# Altium PCB Hydro_Node_PCB.PcbDoc
Units mm, origin at the board's own origin, x right, y up, seen from the top; angles counter-clockwise.
Board outline 90 x 70 mm, 2 copper layers (Top Layer, Bottom Layer); 38 components, 30 nets, 139 pads, 1 vias.
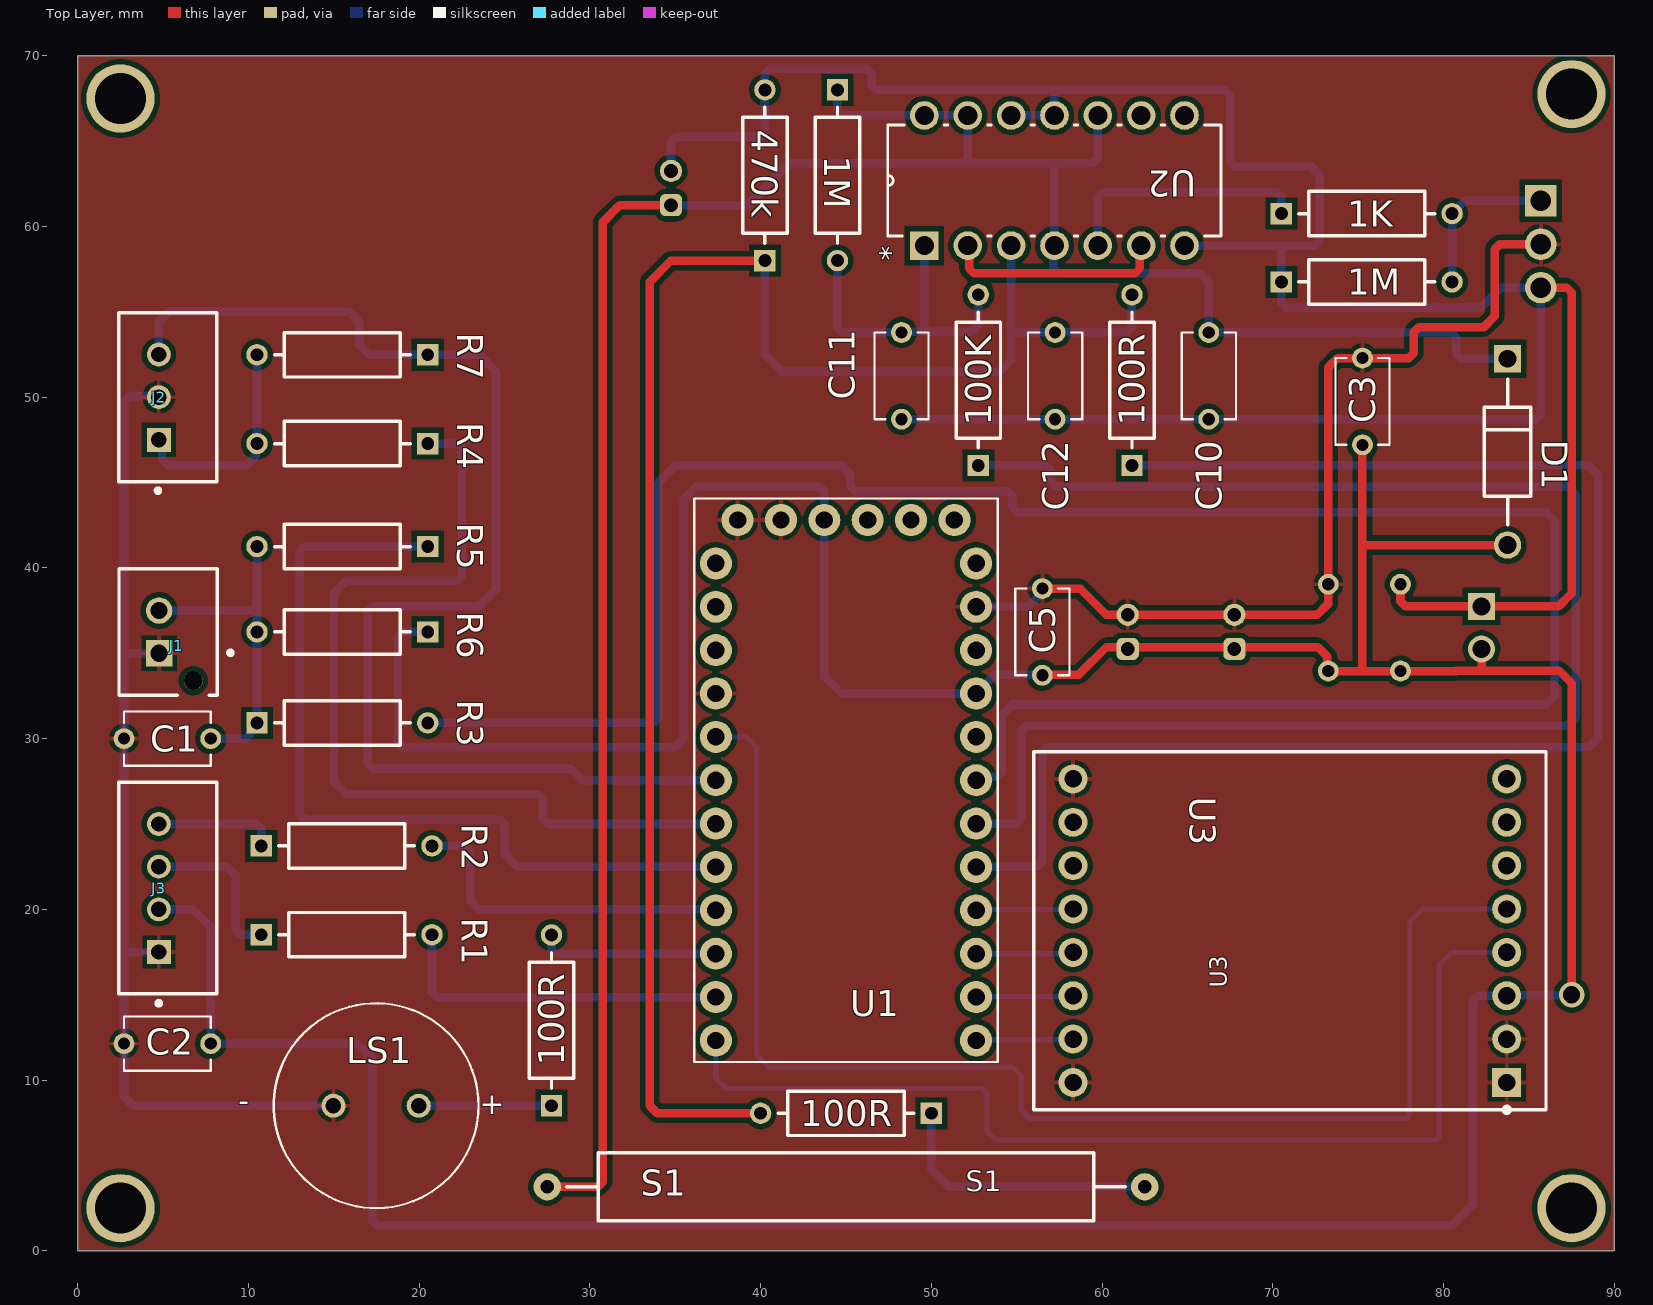
[diagram p0: Top Layer view]
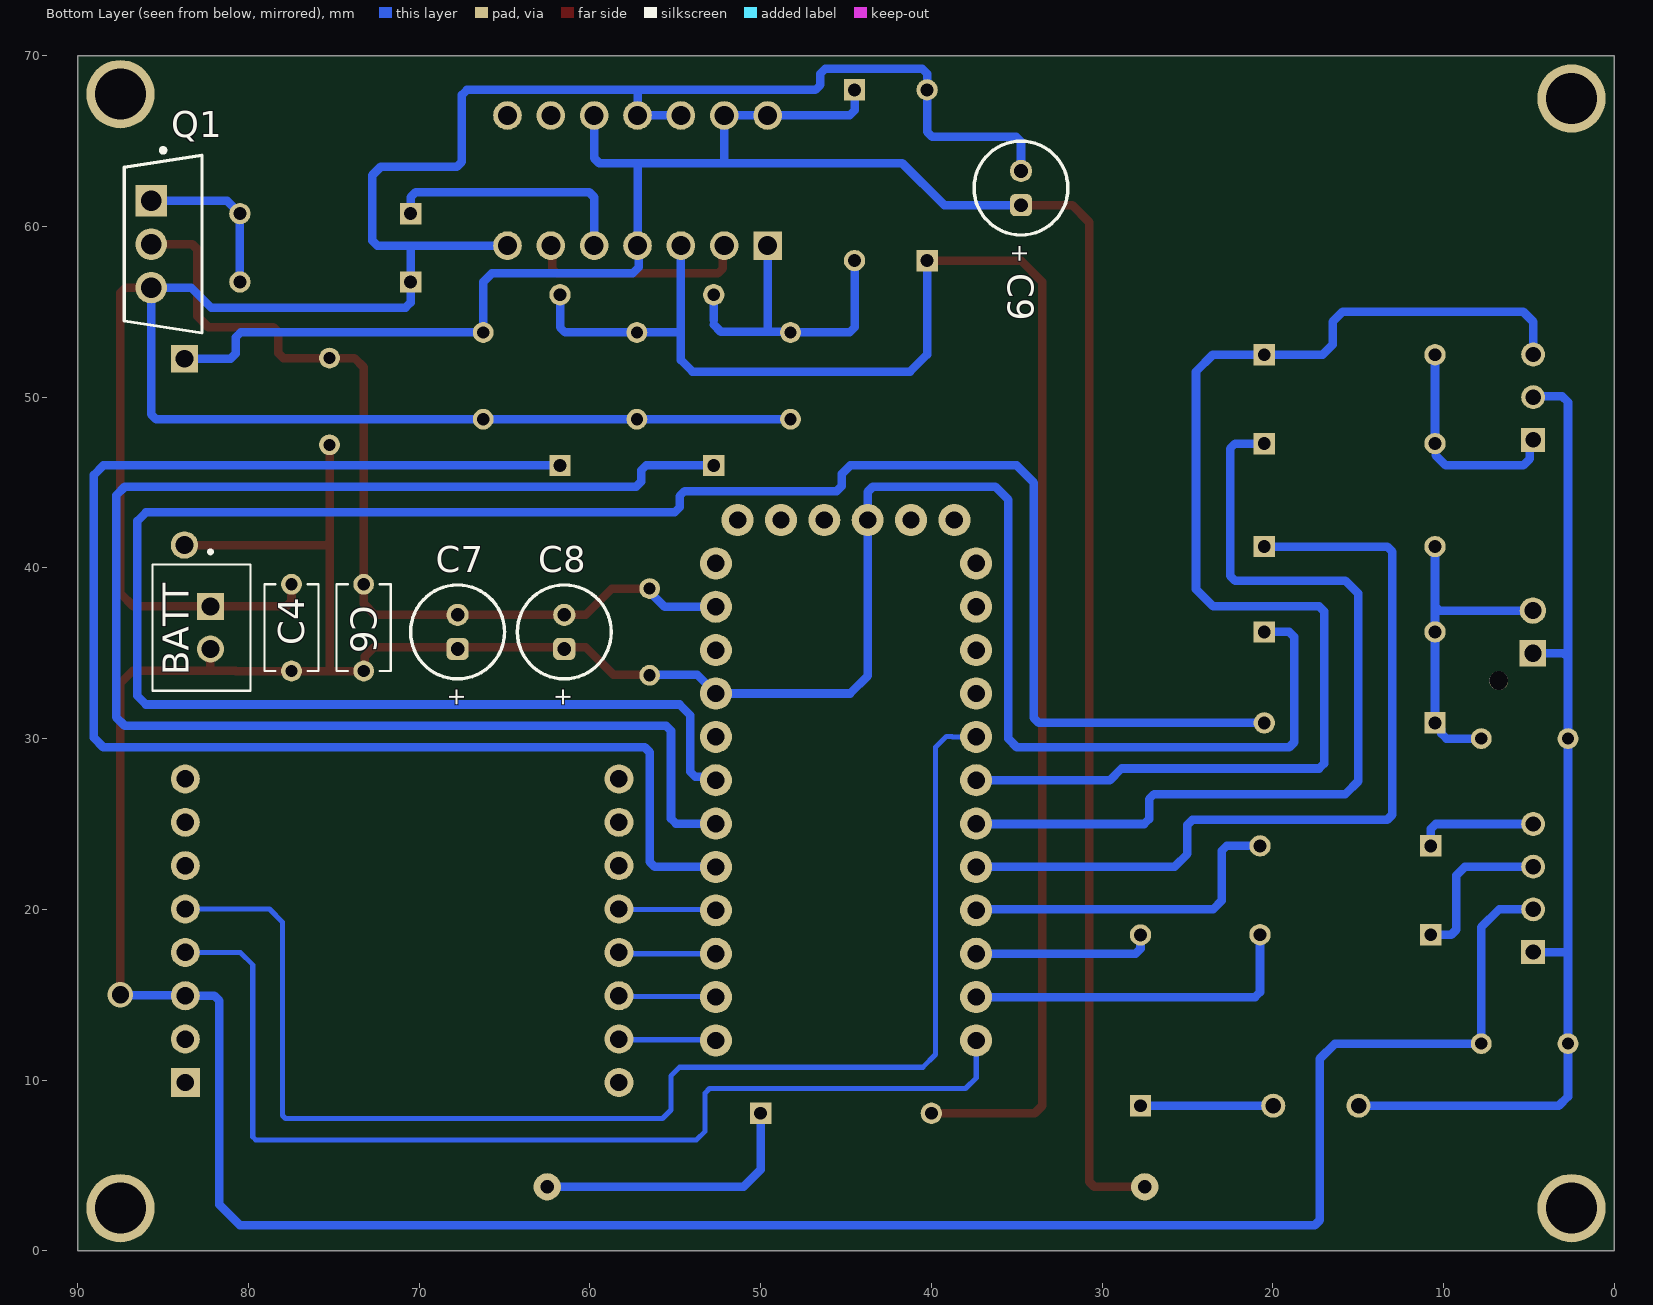
[diagram p1: Bottom Layer view, seen from below]
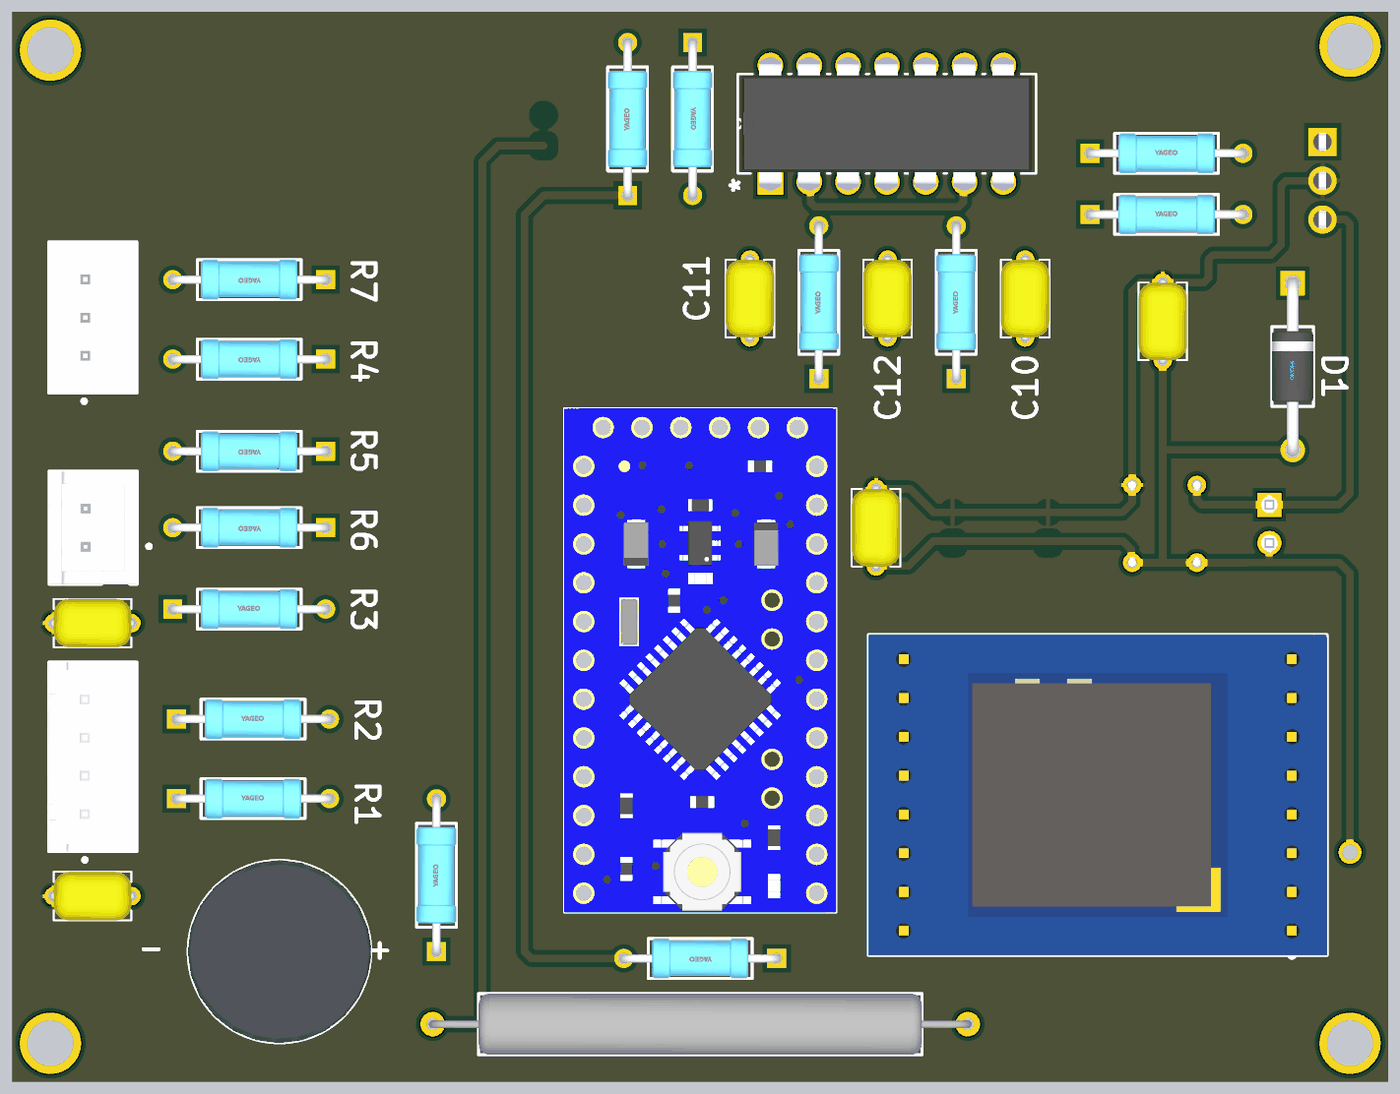
[diagram p2: 3D render of the assembled board from above, using the file's embedded part models]
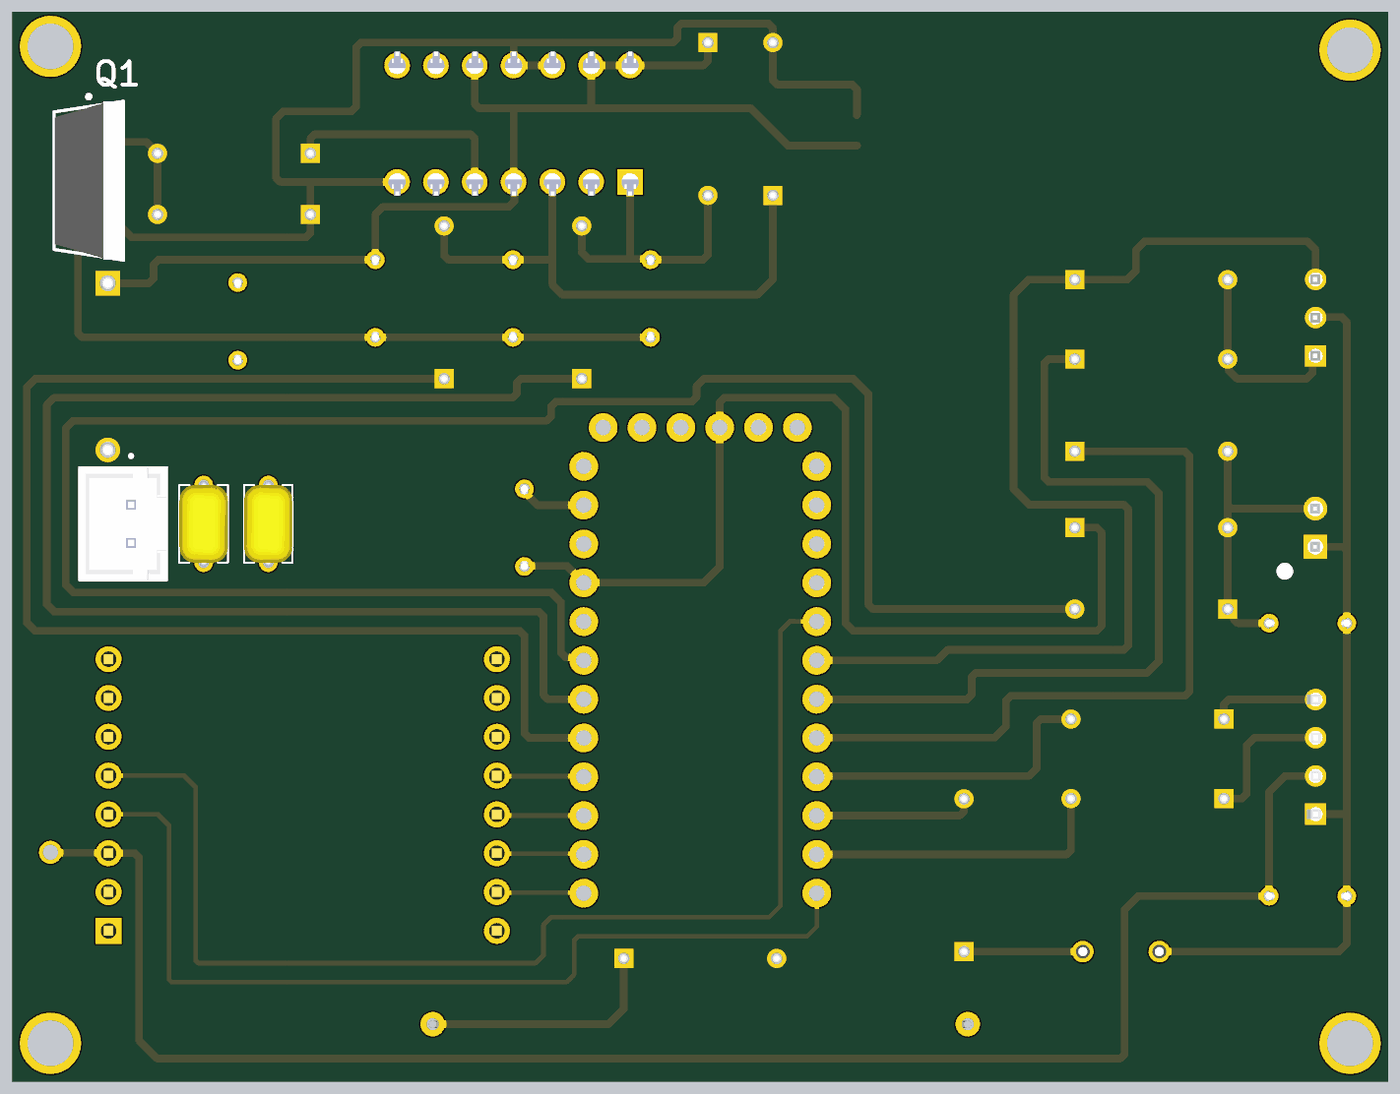
[diagram p3: 3D render of the assembled board from below, using the file's embedded part models]

## Layer stack, top to bottom
Top Solder: solder mask 0.0102, Solder Resist, Dk 3.5
Top Layer: signal copper 0.0356
Dielectric 1: dielectric 0.32, FR-4, Dk 4.8
Bottom Layer: signal copper 0.0356
Bottom Solder: solder mask 0.0102, Solder Resist, Dk 3.5

## Board outline
0,0 0,70 90,70 90,0

## Design rules (kind name [scope] priority, off if disabled: settings)
Clearance [All] p1: gap=0.3 ignorepadtopadclearanceinfootprint=FALSE
HoleSize [All] p1: absolutevalues=TRUE maxlimit=3 minlimit=0.025 maxpercent=80.000 minpercent=20.000
PolygonConnect [All] p1: connectstyle=Relief reliefconductorwidth=0.254 reliefentries=4 polygonreliefangle="90 Angle" airgapwidth=0.254
RoutingVias [All] p1: holewidth=0.711 width=1.27 viastyle="Through Hole" minholewidth=0.711 minwidth=1.27 maxholewidth=0.711 maxwidth=1.5
SolderMaskExpansion [All] p1: expansion=0.102 istentingtop=FALSE
Width [All] p1: maxlimit=1 minlimit=0.3 preferedwidth=0.5
29 further rules are at their usual default settings.

## Classes and differential pairs
component class Hydro_Node_Schematic: 1K 1M 100K 100R 100r 470k BATT C1 C2 C3 C4 C5 C6 C7 C8 C9 C11 C12 D1 J1 J2 J3 LS1 Q1 R1 R2 R3 R4 R5 R6 R7 S1 U1 U3

## Components (designator, comment, footprint, x,y, rotation, side; value= is the part's Value field where it differs from the comment)
1K "1 KΩ" FP-MFR-25-MFG 75.5,60.75 r0 top value=1kΩ (schematic designator R10)
1M "1 MΩ" FP-MFR-25-MFG 44.5,63 r270 top (schematic designator R11)
1M "1 MΩ" FP-MFR-25-MFG 75.5,56.75 r0 top (schematic designator R8)
100K "100 KΩ" FP-MFR-25-MFG 52.75,51 r90 top value=100kΩ (schematic designator R9)
100R "100Ω" FP-MFR-25-MFG 27.75,13.5 r90 top (schematic designator R15)
100R "100Ω" FP-MFR-25-MFG 61.75,51 r90 top (schematic designator R13)
100R "100Ω" FP-MFR-25-MFG 45,8.054 r180 top (schematic designator R12)
470k "470 kΩ" FP-MFR-25-MFG 40.25,63 r90 top (schematic designator R14)
BATT "3.6v" JST_B2B-XH-A_(LF)(SN) 82.75,36.5 r90 bottom
C1 "100nF" CAPRR508W50L508T317H508 5.25,30 r180 top
C2 "100nF" CAPRR508W50L508T317H508 5.25,12.133 r180 top
C3 "100nF" CAPRR508W50L508T317H508 75.25,49.75 r270 top
C4 "100nF" CAPRR508W50L508T317H508 77.479,36.5 r270 bottom
C5 "100nF" CAPRR508W50L508T317H508 56.5,36.25 r270 top
C6 "100nF" CAPRR508W50L508T317H508 73.25,36.5 r90 bottom
C7 "100uf" WCAP-ATLL_D5H11 -1202.25,-1233.75 r270 bottom
C8 "10uf" WCAP-ATLL_D5H11 -1208.5,-1233.75 r270 bottom
C9 "10uf" WCAP-ATLL_D5H11 -1235.25,-1207.75 r270 bottom
C10 "100nF" CAPRR508W50L508T317H508 66.25,51.25 r270 top
C11 "100nF" CAPRR508W50L508T317H508 48.25,51.25 r270 top
C12 "100nF" CAPRR508W50L508T317H508 57.25,51.25 r270 top
D1 "1N5819" FP-DO-41_Plastic-MFG 83.75,46.794 r270 top value="110 pF"
J1 "Flow Switch" FP-B2B-XH-AM_LF_SN-MFG 5.291,36.25 r270 top
J2 "Temp" FP-B3B-XH-A_LF_SN-MFG 5.275,50 r90 top
J3 "Ultrasonic" FP-B4B-XH-A_LF_SN-MFG 5.275,21.25 r270 top
LS1 "Buzzer" CUI_CPT-1255C-090 17.475,8.5 r180 top
Q1 "IRLZ44N" FP-PG-TO220-3-MFG 84.995,58.96 r180 bottom
R1 "100Ω" FP-MFR-25-MFG 15.75,18.516 r0 top
R2 "100Ω" FP-MFR-25-MFG 15.75,23.719 r0 top
R3 "330Ω" FP-MFR-25-MFG 15.5,30.922 r0 top
R4 "100Ω" FP-MFR-25-MFG 15.5,47.281 r180 top
R5 "100Ω" FP-MFR-25-MFG 15.5,41.25 r180 top
R6 "1 MΩ" FP-MFR-25-MFG 15.5,36.25 r180 top
R7 "4.7 kΩ" FP-MFR-25-MFG 15.5,52.484 r180 top
S1 "Reed Switch" REEDSW-THT-D4L29-P35 45,3.75 r180 top value="SPST-NO Reed"
U1 "ARDUINO_PRO_MINI" MODULE_ARDUINO_PRO_MINI 45,27.563 r0 top
U2 "74HC74N" DIP254P762X420-14 64.83,66.5 r90 top
U3 "Ra-02" RA-02_BREAKOUT_THT_2X8 71,18.75 r90 top

## Footprints (in the part's own frame and the unit in brackets; to place one, negate y for a bottom-side part, rotate by r counter-clockwise, add the part's x,y. Pads: shape width x height; smd on the part's side, far side on the other; paste and mask are expansions set on the pad)
CAPRR508W50L508T317H508 [mm]
  round 1.218 hole 0.71: 1(-2.54,0) 2(2.54,0)
  silkscreen extent -2.54,-1.59 2.54,1.59, body extent -2.79,-1.59 2.79,1.59, height 5.86
CUI_CPT-1255C-090 [mm]
  round 1.408 hole 0.9 mask+0.102: N(2.5,0) P(-2.5,0)
  silkscreen extent -6,-6 6,6, body extent -6,-5.99 6,5.99, height 5.5
DIP254P762X420-14 [mil]
  rect 66x66 / inner round 66 / far side rect 66x66 hole 44 mask+4.02: 1(-300,600)
  round 66 hole 44 mask+4.02: 2(-300,500) 3(-300,400) 4(-300,300) 5(-300,200) 6(-300,100) 7(-300,0) 8(0,0) 9(0,100) 10(0,200) 11(0,300) 12(0,400) 13(0,500) 14(0,600)
  silkscreen extent -278,-84 -22,684, body extent -336,-74 36,675, height 165
FP-B2B-XH-AM_LF_SN-MFG [mm]
  rect 1.55x1.55 hole 1 paste-2539.97 mask+0: 1(1.25,-0.525)
  round 1.55 hole 1 paste-2539.97 mask+0: 2(-1.25,-0.525)
  round 1.1 hole 1.1 unplated paste-2539.97 mask+0: ""(2.85,1.475)
  silkscreen extent -3.7,-2.88 3.7,3.78, body extent -3.8,-2.98 3.8,2.98, height 0.25
FP-B3B-XH-A_LF_SN-MFG [mm]
  rect 1.4x1.4 hole 0.9 paste-2539.97 mask+0: 1(-2.5,0.525)
  round 1.4 hole 0.9 paste-2539.97 mask+0: 2(0,0.525) 3(2.5,0.525)
  silkscreen extent -5.6,-2.88 4.95,2.88, body extent -5.05,-2.98 5.05,2.98, height 0.25
FP-B4B-XH-A_LF_SN-MFG [mm]
  rect 1.4x1.4 hole 0.9 paste-2539.97 mask+0: 1(3.75,-0.525)
  round 1.4 hole 0.9 paste-2539.97 mask+0: 2(1.25,-0.525) 3(-1.25,-0.525) 4(-3.75,-0.525)
  silkscreen extent -6.2,-2.88 6.87,2.88, body extent -6.3,-2.98 6.3,2.98, height 0.25
FP-DO-41_Plastic-MFG [mm]
  rect 1.6x1.6 hole 1.05 paste-2539.97 mask+0: 1(-5.456,0)
  round 1.6 hole 1.05 paste-2539.97 mask+0: 2(5.456,0)
  silkscreen extent -4.26,-1.36 4.26,1.36, body extent -6.36,-1.46 6.36,1.46, height 0.25
FP-MFR-25-MFG [mm]
  rect 1.25x1.25 hole 0.75 paste-2539.97 mask+0: 1(-5,0)
  round 1.25 hole 0.75 paste-2539.97 mask+0: 2(5,0)
  silkscreen extent -3.98,-1.3 3.98,1.3, body extent -5.72,-1.4 5.72,1.4, height 0.25
FP-PG-TO220-3-MFG [mm]
  rect 1.85x1.85 hole 1.2 paste-2539.97 mask+0: 1(-0.705,2.54)
  round 1.85 hole 1.2 paste-2539.97 mask+0: 2(-0.705,0) 3(-0.705,-2.54)
  silkscreen extent -2.27,-5.2 2.27,5.62, body extent -2.23,-5.18 2.22,5.18, height 19.15
JST_B2B-XH-A_(LF)(SN) [mm]
  rect 1.575x1.575 / inner round 1.575 / far side rect 1.575x1.575 hole 1.05: 1(1.25,-0.525)
  round 1.575 hole 1.05: 2(-1.25,-0.525)
  silkscreen extent -3.7,-2.88 4.54,2.88, body extent -3.7,-2.88 3.7,2.88, height 7
MODULE_ARDUINO_PRO_MINI [mil]
  round 74 hole 40: JP1_1(250,600) JP1_2(150,600) JP1_3(50,600) JP1_4(-50,600) JP1_5(-150,600) JP1_6(-250,600) JP6_1(300,500) JP6_2(300,400) JP6_3(300,300) JP6_4(300,200) JP6_5(300,100) JP6_6(300,0) JP6_7(300,-100) JP6_8(300,-200) JP6_9(300,-300) JP6_10(300,-400) JP6_11(300,-500) JP6_12(300,-600) JP7_1(-300,-600) JP7_2(-300,-500) JP7_3(-300,-400) JP7_4(-300,-300) JP7_5(-300,-200) JP7_6(-300,-100) JP7_7(-300,0) JP7_8(-300,100) JP7_9(-300,200) JP7_10(-300,300) JP7_11(-300,400) JP7_12(-300,500)
  silkscreen extent -350,-650 350,650, body extent -350,-650 350,650, height 133
RA-02_BREAKOUT_THT_2X8 [mm] "Ai-Thinker Ra-02 LoRa breakout / adapter board, 2 x 8 THT header, 2.54 mm pitch, rows 25.4 mm apart"
  rect 1.7x1.7 hole 1.02: 1(-8.89,-12.7)
  round 1.7 hole 1.02: 2(-6.35,-12.7) 3(-3.81,-12.7) 4(-1.27,-12.7) 5(1.27,-12.7) 6(3.81,-12.7) 7(6.35,-12.7) 8(8.89,-12.7) 9(8.89,12.7) 10(6.35,12.7) 11(3.81,12.7) 12(1.27,12.7) 13(-1.27,12.7) 14(-3.81,12.7) 15(-6.35,12.7) 16(-8.89,12.7)
  silkscreen extent -10.64,-15 10.49,15, body extent -10.49,-15 10.49,15, height 7.3
REEDSW-THT-D4L29-P35 [mm] "Magnetic reed switch, normally open, glass body 4.0 x 29.0 mm, axial leads bent for 35.0 mm through-hole pitch"
  round 1.6 hole 0.8: 1(-17.5,0) 2(17.5,0)
  silkscreen extent -16.35,-2 16.35,2, body extent -17.75,-1.99 17.75,1.99, height 4
WCAP-ATLL_D5H11 [mm] "Aluminum Electrolytic Capacitors, 5x11mm"
  rrect50% 1.3x1.3 hole 0.8: 1(-1269,-1270)
  round 1.3 hole 0.8: 2(-1271,-1270)
  silkscreen extent -1272.75,-1272.75 -1267.25,-1267.25, body extent -1272.49,-1272.5 -1267.5,-1267.5, height 11.31

## Part data
1K: library part CMP-03413-000001-1, "RES 1.18K OHM 1/4W 1% AXIAL", Manufacturer=Yageo, Manufacturer Part Number=MFR-25FBF52-1K, Package=MFR-25, Power Rating=0.25W, Resistance=1kΩ, Temperature="-55°C to +155°C", Temperature Coefficient=100ppm/°C, Temperature Range High=+155°C, Temperature Range Low=-55°C, Tolerance=1%, Voltage Rating=250V, Automotive=No, Category=Res, ComponentLink2Description=Datasheet, ComponentLink2URL=https://www.yageo.com/upload/media/product/products/datasheet/lr/Yageo_LR_MFR_1.pdf, Composition="Metal Film", Device Class L1="Passive Components", Device Class L2=Resistors, Device Class L3="Through-Hole Resistors", Digikey Description="RES 1.18K OHM 1/4W 1% AXIAL", Height=2.6mm, Ipc Land Pattern Name=RESAD1000W75L680D260, Lead Free=Yes, Mouser Description="Metal Film Resistors 1.18K OHM 1/4W 1%", Octopart=https://octopart.com/mfr-25fbf52-1k18-yageo-56251681, RoHS=TRUE, Series=MFR
1M 1M R6: library part CMP-03413-000001-1, "RES 1.18K OHM 1/4W 1% AXIAL", Manufacturer=Yageo, Manufacturer Part Number=MFR-25FBF52-1MΩ, Package=MFR-25, Power Rating=0.25W, Temperature="-55°C to +155°C", Temperature Coefficient=100ppm/°C, Temperature Range High=+155°C, Temperature Range Low=-55°C, Tolerance=1%, Voltage Rating=250V, Automotive=No, Category=Res, ComponentLink2Description=Datasheet, ComponentLink2URL=https://www.yageo.com/upload/media/product/products/datasheet/lr/Yageo_LR_MFR_1.pdf, Composition="Metal Film", Device Class L1="Passive Components", Device Class L2=Resistors, Device Class L3="Through-Hole Resistors", Digikey Description="RES 1.18K OHM 1/4W 1% AXIAL", Height=2.6mm, Ipc Land Pattern Name=RESAD1000W75L680D260, Lead Free=Yes, Mouser Description="Metal Film Resistors 1.18K OHM 1/4W 1%", Octopart=https://octopart.com/mfr-25fbf52-1k18-yageo-56251681, Resistance="1 MΩ", RoHS=TRUE, Series=MFR
100K: library part CMP-03413-000001-1, "RES 1.18K OHM 1/4W 1% AXIAL", Manufacturer=Yageo, Manufacturer Part Number=MFR-25FBF52-100K, Package=MFR-25, Power Rating=0.25W, Resistance=100kΩ, Temperature="-55°C to +155°C", Temperature Coefficient=100ppm/°C, Temperature Range High=+155°C, Temperature Range Low=-55°C, Tolerance=1%, Voltage Rating=250V, Automotive=No, Category=Res, ComponentLink2Description=Datasheet, ComponentLink2URL=https://www.yageo.com/upload/media/product/products/datasheet/lr/Yageo_LR_MFR_1.pdf, Composition="Metal Film", Device Class L1="Passive Components", Device Class L2=Resistors, Device Class L3="Through-Hole Resistors", Digikey Description="RES 100K OHM 1/4W 1% AXIAL", Height=2.6mm, Ipc Land Pattern Name=RESAD1000W75L680D260, Lead Free=Yes, Mouser Description="Metal Film Resistors 100K OHM 1/4W 1%", Octopart=https://octopart.com/mfr-25fbf52-1k18-yageo-56251681, RoHS=TRUE, Series=MFR
100R 100R 100R R1 R2 R4 R5: library part CMP-03413-000001-1, "RES 1.18K OHM 1/4W 1% AXIAL", Manufacturer=Yageo, Manufacturer Part Number=MFR-25FBF52-100R, Package=MFR-25, Power Rating=0.25W, Temperature="-55°C to +155°C", Temperature Coefficient=100ppm/°C, Temperature Range High=+155°C, Temperature Range Low=-55°C, Tolerance=1%, Voltage Rating=250V, Automotive=No, Category=Res, ComponentLink2Description=Datasheet, ComponentLink2URL=https://www.yageo.com/upload/media/product/products/datasheet/lr/Yageo_LR_MFR_1.pdf, Composition="Metal Film", Device Class L1="Passive Components", Device Class L2=Resistors, Device Class L3="Through-Hole Resistors", Digikey Description="RES 1.18K OHM 1/4W 1% AXIAL", Height=2.6mm, Ipc Land Pattern Name=RESAD1000W75L680D260, Lead Free=Yes, Mouser Description="Metal Film Resistors 1.18K OHM 1/4W 1%", Octopart=https://octopart.com/mfr-25fbf52-1k18-yageo-56251681, Resistance=100Ω, RoHS=TRUE, Series=MFR
470k: library part CMP-03413-000001-1, "RES 1.18K OHM 1/4W 1% AXIAL", Manufacturer=Yageo, Manufacturer Part Number=MFR-25FBF52-470K, Package=MFR-25, Power Rating=0.25W, Temperature="-55°C to +155°C", Temperature Coefficient=100ppm/°C, Temperature Range High=+155°C, Temperature Range Low=-55°C, Tolerance=1%, Voltage Rating=250V, Automotive=No, Category=Res, ComponentLink2Description=Datasheet, ComponentLink2URL=https://www.yageo.com/upload/media/product/products/datasheet/lr/Yageo_LR_MFR_1.pdf, Composition="Metal Film", Device Class L1="Passive Components", Device Class L2=Resistors, Device Class L3="Through-Hole Resistors", Digikey Description="RES 1.18K OHM 1/4W 1% AXIAL", Height=2.6mm, Ipc Land Pattern Name=RESAD1000W75L680D260, Lead Free=Yes, Mouser Description="Metal Film Resistors 1.18K OHM 1/4W 1%", Octopart=https://octopart.com/mfr-25fbf52-1k18-yageo-56251681, Resistance="470 kΩ", RoHS=TRUE, Series=MFR
BATT: library part B2B-XH-A_(LF)(SN), "Connector Header Through Hole 2 position 0.098 (2.50mm)", Package=None, Check_prices=https://www.snapeda.com/parts/B2B-XH-A%20(LF)(SN)/JST+Sales+America+Inc./view-part/?ref=eda, MF="JST Sales", MP="B2B-XH-A (LF)(SN)", SnapEDA_Link=https://www.snapeda.com/parts/B2B-XH-A%20(LF)(SN)/JST+Sales+America+Inc./view-part/?ref=snap
C1 C2 C3 C4 C5 C6 C10 C11 C12: library part SR215E104MARTR1., "SR Series 5.08x5.08 mm 100 nF 50 V Â±20% Tol. Z5U Radial Lead/SkyCapÂ®", Package="Radial AVX Interconnect / Elco", Capacitance=100nF, Check_prices=https://www.snapeda.com/parts/SR215E104MARTR1/AVX/view-part/?ref=eda, MF=AVX, MP=SR215E104MARTR1, SnapEDA_Link=https://www.snapeda.com/parts/SR215E104MARTR1/AVX/view-part/?ref=snap
C7: library part CMP-03913-54007379-2, "WCAP-ATLL Aluminum Electrolytic Capacitors", Capacitance=100µF, Case/Package=Radial, Leakage Current=10µA, Max Operating Temperature=105°C, Min Operating Temperature=-55°C, Ripple Current=222mA, Tolerance=20%, Voltage Rating=10V, Diameter=5mm, Height - Seated (Max)=12.4968mm, Impedance=1.02Ω, Lead Pitch=2.0066mm, Length=11mm, Life (Hours)=4000hours, Mount="Through Hole", Packaging="Tape & Box (TB)", Pitch=2mm, Polarity=Polar, RoHS=Compliant
C8 C9: library part CMP-03913-53914479-2, "Alum. Electrolytic Cap 10UF 50V 5MM Radial Wcap-atll, Lifetime 4000H +105OC", Capacitance=10µF, Case/Package=Radial, Leakage Current=5µA, Max Operating Temperature=105°C, Min Operating Temperature=-55°C, Ripple Current=120mA, Tolerance=20%, Voltage Rating=50V, Diameter=5mm, Height=11mm, Height - Seated (Max)=12.4968mm, Impedance=2.6Ω, Lead Pitch=2.0066mm, Length=11mm, Life (Hours)=4000hours, Material=Aluminium, Mount="Through Hole", Packaging="Tape & Box (TB)", Pitch=2mm, Polarity=Polar, REACH SVHC=Unknown, RoHS=Compliant, Voltage Rating (DC)=50V
D1: library part CMP-12790-000042-1, "DIODE SCHOTTKY 40V 1A DO41", Capacitance="110 pF", Forward Current=1A, Manufacturer="Diodes Inc.", Manufacturer Part Number=1N5819-T, Max Junction Temp=+125°C, Max Repetitive Reverse Voltage=40V, Max Surge Forward Current=25A, Package="DO-41 (Plastic)", Peak Reverse Current=1mA, Temperature="-65°C to +125°C", Temperature Range Low=-65°C, Automotive=No, Category=Diode, ComponentLink2Description=Datasheet, ComponentLink2URL=https://www.diodes.com/assets/Datasheets/ds23001.pdf, Device Class L1="Discrete Semiconductors", Device Class L2=Diodes, Device Class L3="Schottky Diodes", Digikey Description="DIODE SCHOTTKY 40V 1A DO41", Footprint Url=https://www.diodes.com/assets/Package-Files/DO-41-Plastic.pdf, Height=2.72mm, Ipc Land Pattern Name=DIOPA1091W105L521D272, Lead Free=Yes, Mouser Description="Schottky Diodes & Rectifiers Vr/40V Io/1A T/R", Octopart=https://octopart.com/1n5819-t-diodes+inc.-55389586, Reverse Voltage=40V, RoHS=TRUE, Temperature Range High=+125°C
J1: library part CMP-17439-000037-1, "CONN HEADER VERT 2POS 2.5MM", Color=Green, Contact Resistance=20mR, Housing Color=White, Max Current Rating=3A, Max Operating Temperature=85°C, Max Voltage Rating (AC)=250V, Min Operating Temperature=-25°C, Connector Type="Male Pin", Contact Material=Brass, Contact Plating=Tin, Contact Type="Male Pin", Depth=5.75mm, Fastening Type=Detent, Housing Material=Polyamide, Lead Free="Lead Free", Length=7.4mm, Mount="Through Hole", Number of Positions=2, Number of Rows=1, Orientation=Straight, Packaging=Bulk, Pitch=2.5mm, Series=XH, Termination=Solder
J2: library part CMP-17439-000014-3, "CONN HEADER VERT 3POS 2.5MM", Color=Natural, Contact Resistance=20mR, Current Rating=3A, Flammability Rating="UL94 V-0", Housing Color=White, Insulation Resistance=1GR, Max Operating Temperature=85°C, Max Voltage Rating (AC)=250V, Min Operating Temperature=-25°C, Connector Type=Header, Contact Finish - Mating=TIN, Contact Material=Brass, Contact Plating=Tin, Contact Shape=Square, Contact Type="Male Pin", Depth=5.75mm, Fastening Type=Detent, Gender=Male, Housing Material=Polyamide, Insulation Color=Natural, Insulation Material=Nylon, Lead Free="Lead Free", Lead Pitch=2.5mm, Length=9.9mm, Max Current Rating=3A, Max Voltage Rating (DC)=250V, Mount="Through Hole", Number of Contacts=3, Number of Positions=3, Number of Rows=1, Orientation=Straight, Packaging=Bulk, Pitch=2.5mm, REACH SVHC="No SVHC", Series=XH, Termination=Solder, Voltage Rating=250V, Voltage Rating (AC)=250V, Wire/Cable Gauge=22AWG
J3: library part CMP-17439-000250-1, "CONN HEADER VERT 4POS 2.5MM", Color=Natural, Contact Resistance=20mR, Current Rating=3A, Flammability Rating="UL94 V-0", Housing Color=White, Insulation Resistance=1GR, Max Operating Temperature=85°C, Max Voltage Rating (AC)=250V, Min Operating Temperature=-25°C, Package Quantity=500, Connector Type=Header, Contact Finish - Mating=TIN, Contact Material=Brass, Contact Plating=Tin, Contact Shape=Square, Contact Type="Male Pin", Depth=5.75mm, Fastening Type=Detent, Gender=Male, Housing Material=Polyamide, Insulation Color=Natural, Insulation Material=Nylon, Lead Free="Lead Free", Lead Pitch=2.5mm, Length=12.4mm, Mated Stacking Heights=9.8mm, Material=Polyamide, Max Current Rating=3A, Max Voltage Rating (DC)=250V, Mount="Through Hole", Number of Contacts=4, Number of Positions=4, Number of Rows=1, Orientation=Straight, Packaging=Bulk, Pitch=2.5mm, REACH SVHC="No SVHC", Series=XH, Termination=Solder, Voltage Rating=250V, Voltage Rating (AC)=250V, Wire/Cable Gauge=22AWG
LS1: library part CPT-1255C-090, "12 mm, 20 Vp-p, 80 dB, Through Hole, Piezo Audio Transducer Buzzer", Package=None, Check_prices=https://www.snapeda.com/parts/CPT-1255C-090/Same+Sky/view-part/?ref=eda, MF="Same Sky", MP=CPT-1255C-090, SnapEDA_Link=https://www.snapeda.com/parts/CPT-1255C-090/Same+Sky/view-part/?ref=snap
Q1: library part CMP-32901-000488-1, "MOSFET N-CH 55V 47A TO220AB", Case/Package=TO-220, Continuous Drain Current (ID)=47A, Drain to Source Breakdown Voltage=55V, Drain to Source Resistance=35mR, Gate to Source Voltage (Vgs)=16V, Input Capacitance=1.7nF, Max Operating Temperature=175°C, Max Power Dissipation=110W, Min Operating Temperature=-55°C, Threshold Voltage=2V, Drain to Source Voltage (Vdss)=55V, Element Configuration=Single, Halogen Free="Halogen Free", Height=0.6inch, Lead Free="Lead Free", Length=0.414inch, Max Dual Supply Voltage=55V, Mount="Through Hole", Number of Pins=3, Packaging=Rail/Tube, Power Dissipation=110W, Rds On Max=22mR, REACH SVHC="No SVHC", RoHS Compliant=Yes, Turn-Off Delay Time=26ns, Turn-On Delay Time=11ns, Width=0.185inch
R3: library part CMP-03413-000001-1, "RES 1.18K OHM 1/4W 1% AXIAL", Manufacturer=Yageo, Manufacturer Part Number=MFR-25FBF52-330R, Package=MFR-25, Power Rating=0.25W, Temperature="-55°C to +155°C", Temperature Coefficient=100ppm/°C, Temperature Range High=+155°C, Temperature Range Low=-55°C, Tolerance=1%, Voltage Rating=250V, Automotive=No, Category=Res, ComponentLink2Description=Datasheet, ComponentLink2URL=https://www.yageo.com/upload/media/product/products/datasheet/lr/Yageo_LR_MFR_1.pdf, Composition="Metal Film", Device Class L1="Passive Components", Device Class L2=Resistors, Device Class L3="Through-Hole Resistors", Digikey Description="RES 1.18K OHM 1/4W 1% AXIAL", Height=2.6mm, Ipc Land Pattern Name=RESAD1000W75L680D260, Lead Free=Yes, Mouser Description="Metal Film Resistors 1.18K OHM 1/4W 1%", Octopart=https://octopart.com/mfr-25fbf52-1k18-yageo-56251681, Resistance=330Ω, RoHS=TRUE, Series=MFR
R7: library part CMP-03413-000001-1, "RES 1.18K OHM 1/4W 1% AXIAL", Manufacturer=Yageo, Manufacturer Part Number=MFR-25FBF52-4K7, Package=MFR-25, Power Rating=0.25W, Temperature="-55°C to +155°C", Temperature Coefficient=100ppm/°C, Temperature Range High=+155°C, Temperature Range Low=-55°C, Tolerance=1%, Voltage Rating=250V, Automotive=No, Category=Res, ComponentLink2Description=Datasheet, ComponentLink2URL=https://www.yageo.com/upload/media/product/products/datasheet/lr/Yageo_LR_MFR_1.pdf, Composition="Metal Film", Device Class L1="Passive Components", Device Class L2=Resistors, Device Class L3="Through-Hole Resistors", Digikey Description="RES 1.18K OHM 1/4W 1% AXIAL", Height=2.6mm, Ipc Land Pattern Name=RESAD1000W75L680D260, Lead Free=Yes, Mouser Description="Metal Film Resistors 1.18K OHM 1/4W 1%", Octopart=https://octopart.com/mfr-25fbf52-1k18-yageo-56251681, Resistance="4.7 kΩ", RoHS=TRUE, Series=MFR
S1: library part REED-SWITCH-NO-D4L29, "Magnetic reed switch, normally open, glass body 4.0 x 29.0 mm, axial leads bent for 35.0 mm through-hole pitch", Contact Rating="TBD - see datasheet", Manufacturer=Littelfuse, Manufacturer Part Number=MDSM-4R-12-18, Package=MDSM-4, Temperature="-40°C to +125°C", Temperature Range High=+125°C, Temperature Range Low=-40°C, Automotive=No, Body Size="4.0 x 29.0 mm glass", Category=Switch, ComponentLink2Description=Datasheet, ComponentLink2URL=https://www.littelfuse.com/~/media/electronics/datasheets/reed_switches/littelfuse_reed_switches_mdsm_4_datasheet.pdf.pdf, Device Class L1=Electromechanical, Device Class L2=Switches, Device Class L3=unset, Digikey Description="SWITCH REED SPST-NO 350MA 140V", Height=2.84mm, Lead Free=Yes, Lead Pitch="35.0 mm", Mouser Description="Magnetic / Reed Switches MDSM-4R 5277 12-18", Octopart=https://octopart.com/mdsm-4r-12-18-littelfuse-55632078, Pull-In Sensitivity="TBD AT", RoHS=TRUE, Standoff Height=0mm
U1: "This board was developed for applications and installations where space is premium and projects are made as permanent set ups. Small, available in 3.3 V and 5 V versions, powered by ATmega328P.", Package=None, Check_prices=https://www.snapeda.com/parts/Arduino%20Pro%20Mini/Arduino/view-part/?ref=eda, MF=Arduino, MP="Arduino Pro Mini", SnapEDA_Link=https://www.snapeda.com/parts/Arduino%20Pro%20Mini/Arduino/view-part/?ref=snap
U2: library part 74HC74N,652, "Flip Flop 2 Element D-Type 1 Bit Positive Edge 14-DIP (0.300, 7.62mm)", Package=None, Check_prices=https://www.snapeda.com/parts/74HC74N,652/Nexperia/view-part/?ref=eda, MF=Nexperia, MP=74HC74N,652, SnapEDA_Link=https://www.snapeda.com/parts/74HC74N,652/Nexperia/view-part/?ref=snap
U3: "Ai-Thinker Ra-02 LoRa transceiver module, SX1278, 410-525 MHz, +18 dBm, SPI, IPEX antenna, SMD-16", Frequency="410-525 MHz", LCSC=C90039, Manufacturer=Ai-Thinker, Manufacturer Part Number=Ra-02

## Free pads (board coordinates)
  round 4 hole 3: 4(2.5,2.5) 4(2.5,67.5) 4(87.5,2.5) 4(87.5,67.75)

## Via types
v1: diameter 1.5, hole 1, Top Layer to Bottom Layer, 1 vias

## Nets (pads, with @x,y where several pads share a name; then routed paths per layer and width w, separated by ;. In a path a pad name is that pad's centre, name@x,y a point inside that pad or via, vN(x,y) a via of type N, cw(c..) or ccw(c..) an arc to the next point about the centre after c; other vN are vias at no path point)
BATT+: BATT.2 C2.1 C3.2 C4.2 C5.2 C6.1 C7.1 C8.1 D1.2 J3.2 R6.1 U1.JP1_4 U1.JP6_4 U3.3 | length 259.6
  Top Layer w0.5: U1.JP6_4 U1.JP6_4@52.796,32.643 ; C5.2 56.54,33.75 58.634,33.75 60.25,35.366 61.5,35.366 62.25,35.366 67.75,35.366 72.634,35.366 73.184,34.816 73.184,34.026 C6.1 75.25,33.96 ; C3.2 75.25,41.5 ; BATT.2@82.048,35.073 BATT.2 82.225,35.073 82.225,33.992 82.25,33.967 ; D1.2 75.412,41.338 75.25,41.5 ; v1(87.5,15) 87.5,33.25 86.783,33.967 82.25,33.967 ; 75.25,33.96 75.25,41.5 ; 75.25,33.96 C4.2 80.75,33.96 80.757,33.967 82.25,33.967
  Bottom Layer w0.5: J3.2 6.75,20 7.79,18.96 C2.1 16.367,12.133 17.25,11.25 17.25,1.793 17.543,1.5 80.5,1.5 81.7,2.7 81.7,14.647 81.993,14.94 U3.3 83.73,14.97 87.47,14.97 v1(87.5,15) ; R6.1 19.043,36.25 18.75,35.957 18.75,29.793 19.043,29.5 35,29.5 35.5,30 35.5,44 36.25,44.75 43.437,44.75 43.73,44.457 U1.JP1_4 43.73,33.67 44.757,32.643 U1.JP6_4 53.727,33.75 56.46,33.75 C5.2
BATT-: 1M.1@70.5,56.75 470k.2 BATT.1 C4.1 C9.2 C10.2 C11.2 C12.2 Q1.3 U2.7 U2.11 U2.12 | length 159.8
  Top Layer w0.5: C4.1 77.479,38.043 77.772,37.75 BATT.1 86.75,37.75 87.5,38.5 87.5,56.127 87.207,56.42 Q1.3
  Bottom Layer w0.5: C9.2 34.75,64.957 35.043,65.25 39.957,65.25 40.25,65.543 470k.2 40.25,68.957 40.543,69.25 46.207,69.25 46.5,68.957 46.5,68.293 46.793,68 57.25,68 ; C11.2 C12.2 C10.2 85.407,48.71 85.7,49.003 Q1.3 83.362,56.42 82.192,55.25 70.793,55.25 70.5,55.543 70.5,58.88 ; U2.12 U2.11 57.21,67.96 57.25,68 ; U2.7 70.5,58.88 ; 57.25,68 67.207,68 67.5,67.707 67.5,63.793 67.793,63.5 72.25,63.5 72.75,63 72.75,59.173 72.457,58.88 70.5,58.88
GND: C1.2 C2.2 C3.1 C5.1 C6.2 C7.2 C8.2 J1.1 J2.2 J3.1 LS1.N Q1.2 U1.JP1_5 U1.JP1_6 U1.JP6_2 U1.JP7_9 U3.1 U3.2 U3.9 U3.16 | length 113.9
  Top Layer w0.5: C5.1 58.71,38.79 60.25,37.25 72.594,37.25 73.25,37.906 C6.2 73.25,51.75 73.79,52.29 77.957,52.29 78.25,52.583 78.25,53.807 78.543,54.1 82.35,54.1 83,54.75 83,58.667 83.293,58.96 Q1.2
  Bottom Layer w0.5: J3.1 2.71,17.5 ; J2.2 4.707,50.043 3.043,50.043 2.71,49.71 2.71,34.75 ; J1.1 2.96,35 2.71,34.75 ; LS1.N 3.25,8.5 2.71,9.04 C2.2 2.71,17.5 ; U1.JP6_2 55.627,37.723 56.5,38.596 C5.1 ; 2.71,17.5 C1.2 2.71,34.75
NetC1_1: C1.1 J1.2 R3.1 R5.2 R6.2 | length 19.5
  Bottom Layer w0.5: J1.2 10.25,37.5 10.5,37.75 ; C1.1 9.832,30 10.125,30.293 10.125,30.547 R3.1 R6.2 10.5,37.5 10.5,37.75 ; R5.2@10.5,41.328 10.5,37.75
NetC9_1: 1M.1@44.5,68 C9.1 C10.1 D1.1 S1.2 U2.4 U2.10 U2.13 U2.14 | length 141.6
  Top Layer w0.5: S1.2 30.457,3.75 30.75,4.043 30.75,60.25 31.75,61.25 C9.1
  Bottom Layer w0.5: C9.1 39.25,61.25 41.706,63.706 52.13,63.706 ; 1M.1@44.5,68 44.5,66.793 44.793,66.5 U2.14 U2.13 52.13,63.706 ; U2.10 59.75,63.999 59.457,63.706 57.21,63.706 ; D1.1 81.043,52.25 80.75,52.543 80.75,53.497 80.457,53.79 C10.1 66.25,56.75 65.75,57.25 57.5,57.25 57.25,57.5 57.146,57.604 57.146,58.816 U2.4 57.21,63.706 ; 52.13,63.706 57.21,63.706
NetC11_1: 1M.2@44.5,58 100K.2 C11.1 U2.1 | length 18.8
  Bottom Layer w0.5: 1M.2@44.5,58 44.5,54.083 44.793,53.79 C11.1 48.295,53.835 49.59,53.835 ; U2.1 49.59,53.835 ; 52.75,54.25 52.335,53.835 49.59,53.835 ; 52.75,54.5 100K.2@52.75,55.75
NetC12_1: 100R.2@40,8.054 100R.2@61.75,56 470k.1 C12.1 U2.3 | length 98.4
  Top Layer w0.5: 100R.2@40,8.054 33.946,8.054 33.5,8.5 33.5,56.75 34.75,58 470k.1
  Bottom Layer w0.5: 470k.1 40.25,52.5 41.25,51.5 54,51.5 54.67,52.17 54.67,53.79 U2.3 ; 54.67,53.67 54.79,53.79 C12.1 61.457,53.79 61.75,54.083 100R.2@61.75,55.75
NetJ2_1: J2.1 R4.2 R7.2 | length 12.3
  Bottom Layer w0.5: J2.1 4.95,47.3 4.95,46.386 5.336,46 9.866,46 10.452,46.586 ; R4.2 R7.2
NetJ2_3: J2.3 R7.1 U1.JP7_7 | length 74.6
  Bottom Layer w0.5: J2.3 4.75,54.414 5.336,55 15.914,55 16.5,54.414 16.5,53.07 17.086,52.484 R7.1 23.516,52.484 24.5,51.5 24.5,38.75 23.5,37.75 17.293,37.75 17,37.457 17,28.543 17.293,28.25 28.856,28.25 29.543,27.563 U1.JP7_7
NetJ3_3: J3.3 R1.1 | length 9.5
  Bottom Layer w0.5: J3.3 8.75,22.5 9.26,21.99 9.26,18.809 9.553,18.516 R1.1
NetJ3_4: J3.4 R2.1 | length 7.6
  Bottom Layer w0.5: J3.4 10.457,25 10.604,24.854 10.75,24.707 R2.1 R2.1@10.428,24.041
NetLS1_P: 100R.1@27.75,8.5 LS1.P | length 7.8
  Bottom Layer w0.5: LS1.P 100R.1@27.75,8.5
NetQ1_1: 1K.2 1M.2@80.5,56.75 Q1.1 | length 9.5
  Bottom Layer w0.5: 1M.2@80.5,56.75 1K.2 81.25,61.5 Q1.1
NetR1_2: R1.2 U1.JP7_2 | length 20.1
  Bottom Layer w0.5: R1.2 20.75,15.156 21.043,14.863 U1.JP7_2
NetR2_2: R2.2 U1.JP7_4 | length 19.9
  Bottom Layer w0.5: R2.2 22.707,23.719 23,23.426 23,20.5 23.5,20 37.323,20 U1.JP7_4
NetR3_2: R3.2 U1.JP6_6 | length 130.6
  Bottom Layer w0.5: R3.2 33.707,30.922 34,31.215 34,45 35,46 44.75,46 45.25,45.5 45.25,44.793 45.543,44.5 54.457,44.5 54.75,44.207 54.75,43.543 55.043,43.25 86,43.25 86.5,42.75 86.5,32.5 86,32 54.75,32 54.11,31.36 54.11,28.049 53.817,27.756 52.813,27.756 U1.JP6_6
NetR4_1: R4.1 U1.JP7_6 | length 52.6
  Bottom Layer w0.5: R4.1 22.207,47.281 22.5,46.988 22.5,39.543 22.207,39.25 15.75,39.25 15,38.5 15,27.5 15.75,26.75 26.957,26.75 27.25,26.457 27.25,25.293 27.543,25 37.357,25 U1.JP7_6
NetR5_1: R5.1 U1.JP7_5 | length 49.7
  Bottom Layer w0.5: R5.1 13.293,41.25 13,40.957 13,25.543 13.293,25.25 24.707,25.25 25,24.957 25,23.25 25.75,22.5 37.363,22.5 U1.JP7_5
NetR9_1: 100K.1 U1.JP6_7 | length 89.8
  Bottom Layer w0.5: U1.JP6_7 54.957,25.023 55.25,25.316 55.25,30.457 55.543,30.75 87.25,30.75 87.75,31.25 87.75,44.25 87.25,44.75 57.293,44.75 57,45.043 57,45.707 56.707,46 100K.1
NetR10_1: 1K.1 U2.5 | length 15
  Bottom Layer w0.5: U2.5 59.75,61.707 60.043,62 70.207,62 70.5,61.707 1K.1@70.5,60.5
NetR12_1: 100R.1@50,8.054 S1.1 | length 16.2
  Bottom Layer w0.5: 100R.1@50,8.054 50,4.75 51,3.75 S1.1
NetR13_1: 100R.1@61.75,46 U1.JP6_8 | length 86.3
  Bottom Layer w0.5: U1.JP6_8 56.207,22.483 56.5,22.776 56.5,29.207 56.793,29.5 88.5,29.5 89.05,30.05 89.05,45.45 88.5,46 100R.1@61.75,46
NetR15_2: 100R.2@27.75,18.5 U1.JP7_3 | length 10.3
  Bottom Layer w0.5: 100R.2@27.75,18.25 27.75,17.696 28.043,17.403 U1.JP7_3
NetU1_JP6_9: U1.JP6_9 U3.12 | length 5.7
  Bottom Layer w0.3: U1.JP6_9 52.659,19.982 58.261,19.982 U3.12
NetU1_JP6_10: U1.JP6_10 U3.13 | length 5.7
  Bottom Layer w0.3: U1.JP6_10 58.223,17.403 U3.13
NetU1_JP6_11: U1.JP6_11 U3.14 | length 5.7
  Bottom Layer w0.3: U1.JP6_11 52.659,14.902 58.261,14.902 U3.14
NetU1_JP6_12: U1.JP6_12 U3.15 | length 5.7
  Bottom Layer w0.3: U1.JP6_12 52.659,12.362 58.261,12.362 U3.15
NetU1_JP7_1: U1.JP7_1 U3.4 | length 61.8
  Bottom Layer w0.3: U1.JP7_1 37.374,12.317 37.374,10.126 38,9.5 53,9.5 53.25,9.25 53.25,7 53.75,6.5 79.574,6.5 79.75,6.676 79.75,16.75 80.48,17.48 U3.4
NetU1_JP7_8: U1.JP7_8 U3.5 | length 79
  Bottom Layer w0.3: U1.JP7_8 38.77,30.103 38.793,30.126 39.124,30.126 39.75,29.5 39.75,11.5 40.5,10.75 54.75,10.75 55.25,10.25 55.25,8.25 55.75,7.75 77.824,7.75 78,7.926 78,19.25 78.77,20.02 U3.5
NetU2_2: U2.2 U2.6 | length 13
  Top Layer w0.5: U2.2 52.208,58.802 52.208,57.543 52.501,57.25 61.923,57.25 62.216,57.543 62.216,58.806 U2.6
pads on no net: J1. U1.JP1_1 U1.JP1_2 U1.JP1_3 U1.JP6_1 U1.JP6_3 U1.JP6_5 U1.JP7_10 U1.JP7_11 U1.JP7_12 U2.8 U2.9 U3.6 U3.7 U3.8 U3.10 U3.11

## Polygon pours and split planes (outlines as drawn)
GND on Top Layer "GND_L01_P000" (solid, pour order 0): 0,70 90,70 90,0 0,0

## Text inside footprints (layer, text, board x,y; h text height)
C7: Bottom Overlay "+" at 68.25,33 h1 r90
C8: Bottom Overlay "+" at 62,33 h1 r90
C9: Bottom Overlay "+" at 35.25,59 h1 r90
LS1: Top Overlay "+" at 24.999,9.072 h1.27 r180; Top Overlay "-" at 10.042,9.156 h1.27 r180
U2: Top Overlay "*" at 48.25,58 h1.27 r90; Mechanical 13 "*" at 48.25,58 h1.27 r90